# Altium PCB PCB1.PcbDoc
Units mm, origin at the board's own origin, x right, y up, seen from the top; angles counter-clockwise.
Board outline 64 x 64 mm, 2 copper layers (Top Layer, Bottom Layer), stack 0.801 mm thick; 4 components, 6 nets, 18 pads, 38 vias.
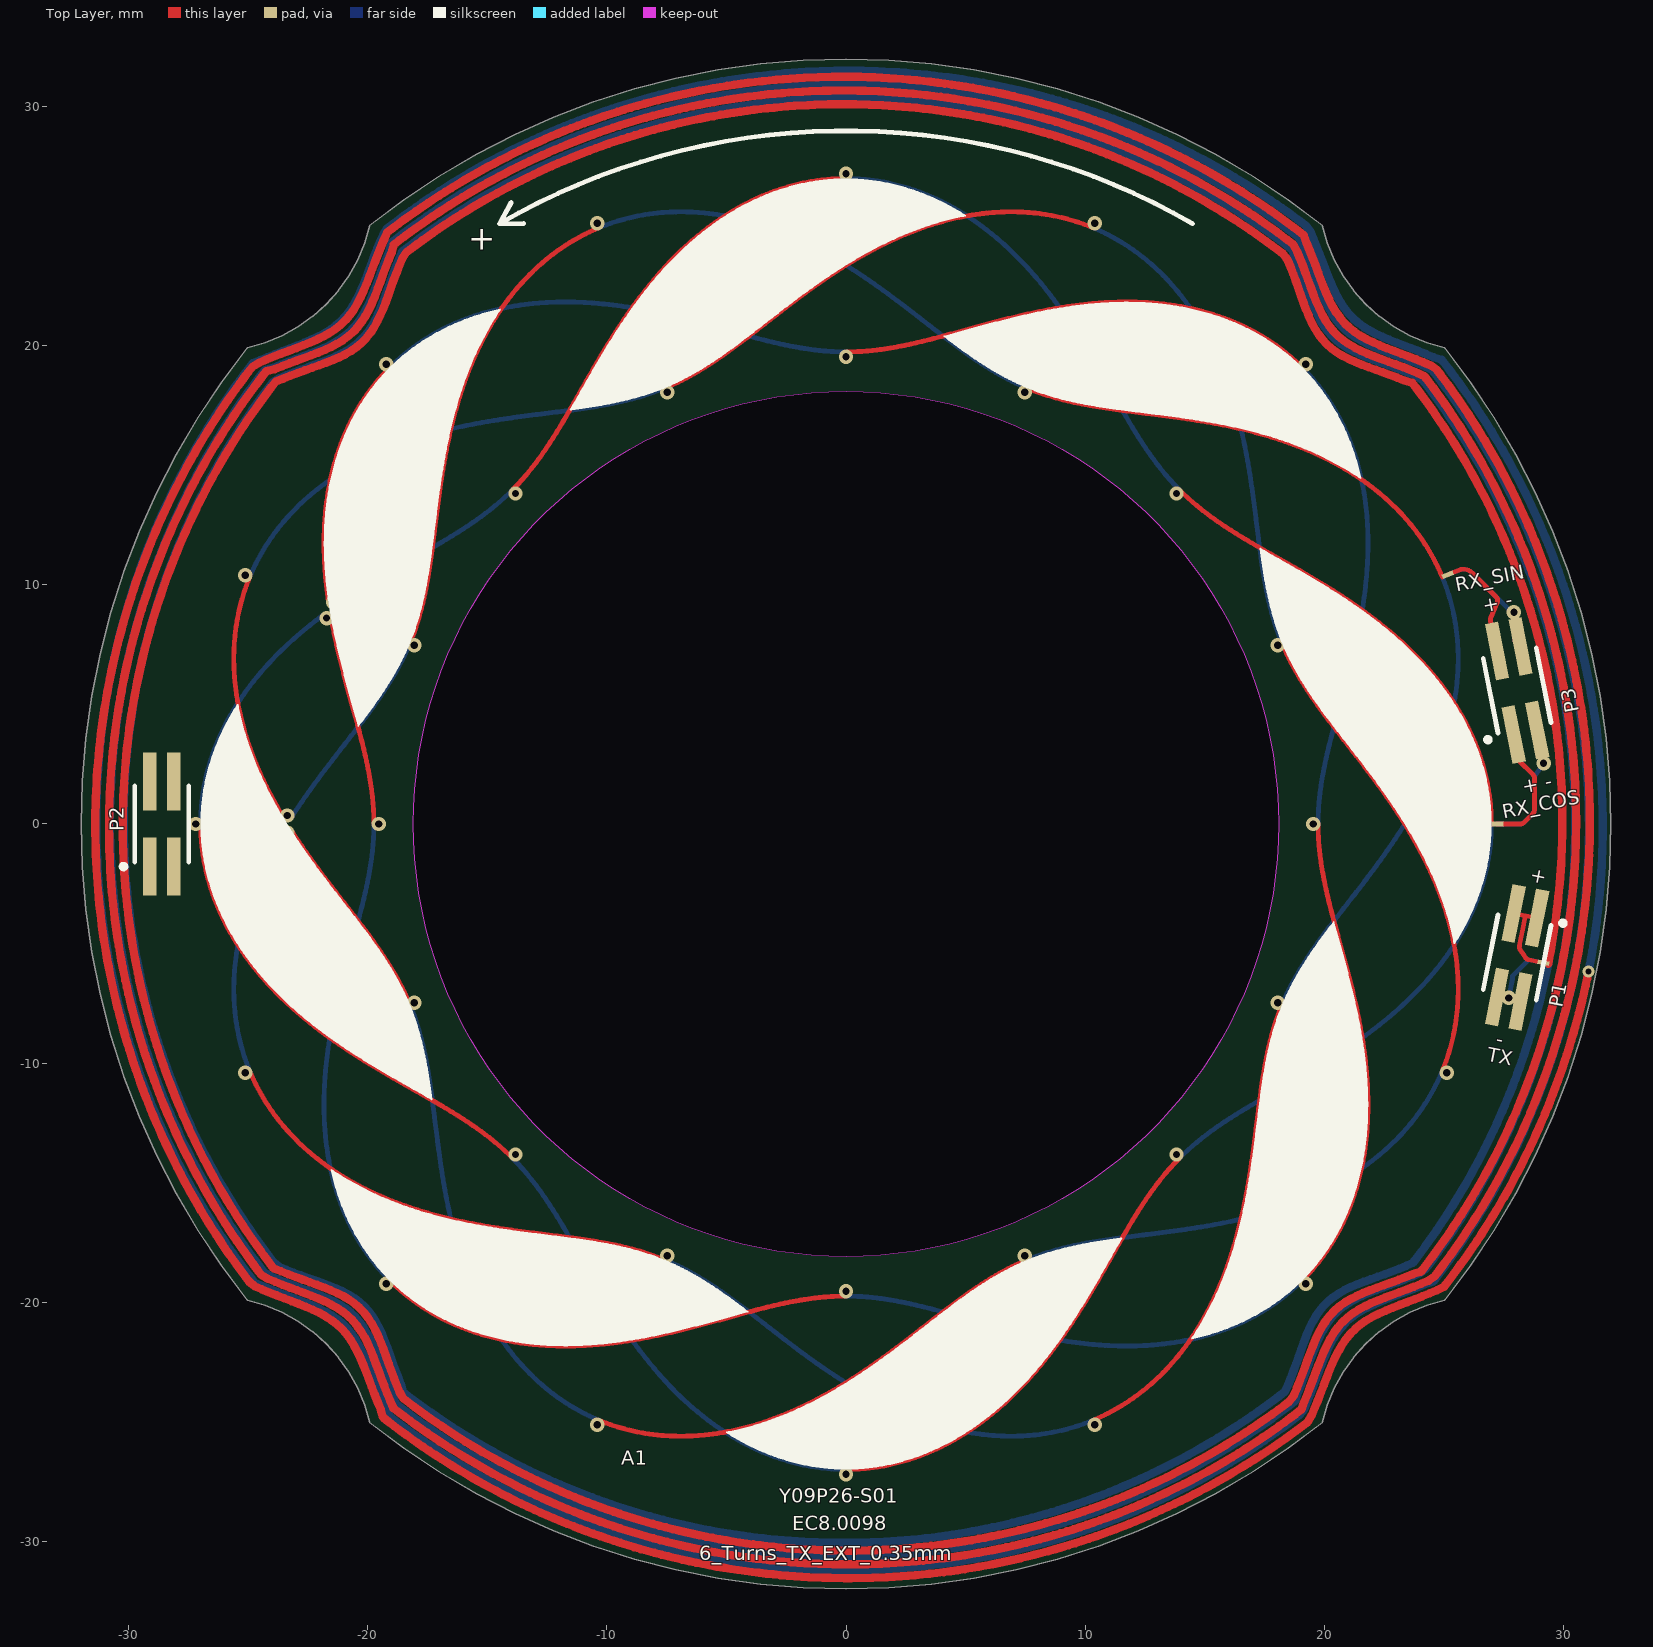
[diagram p0: Top Layer view]
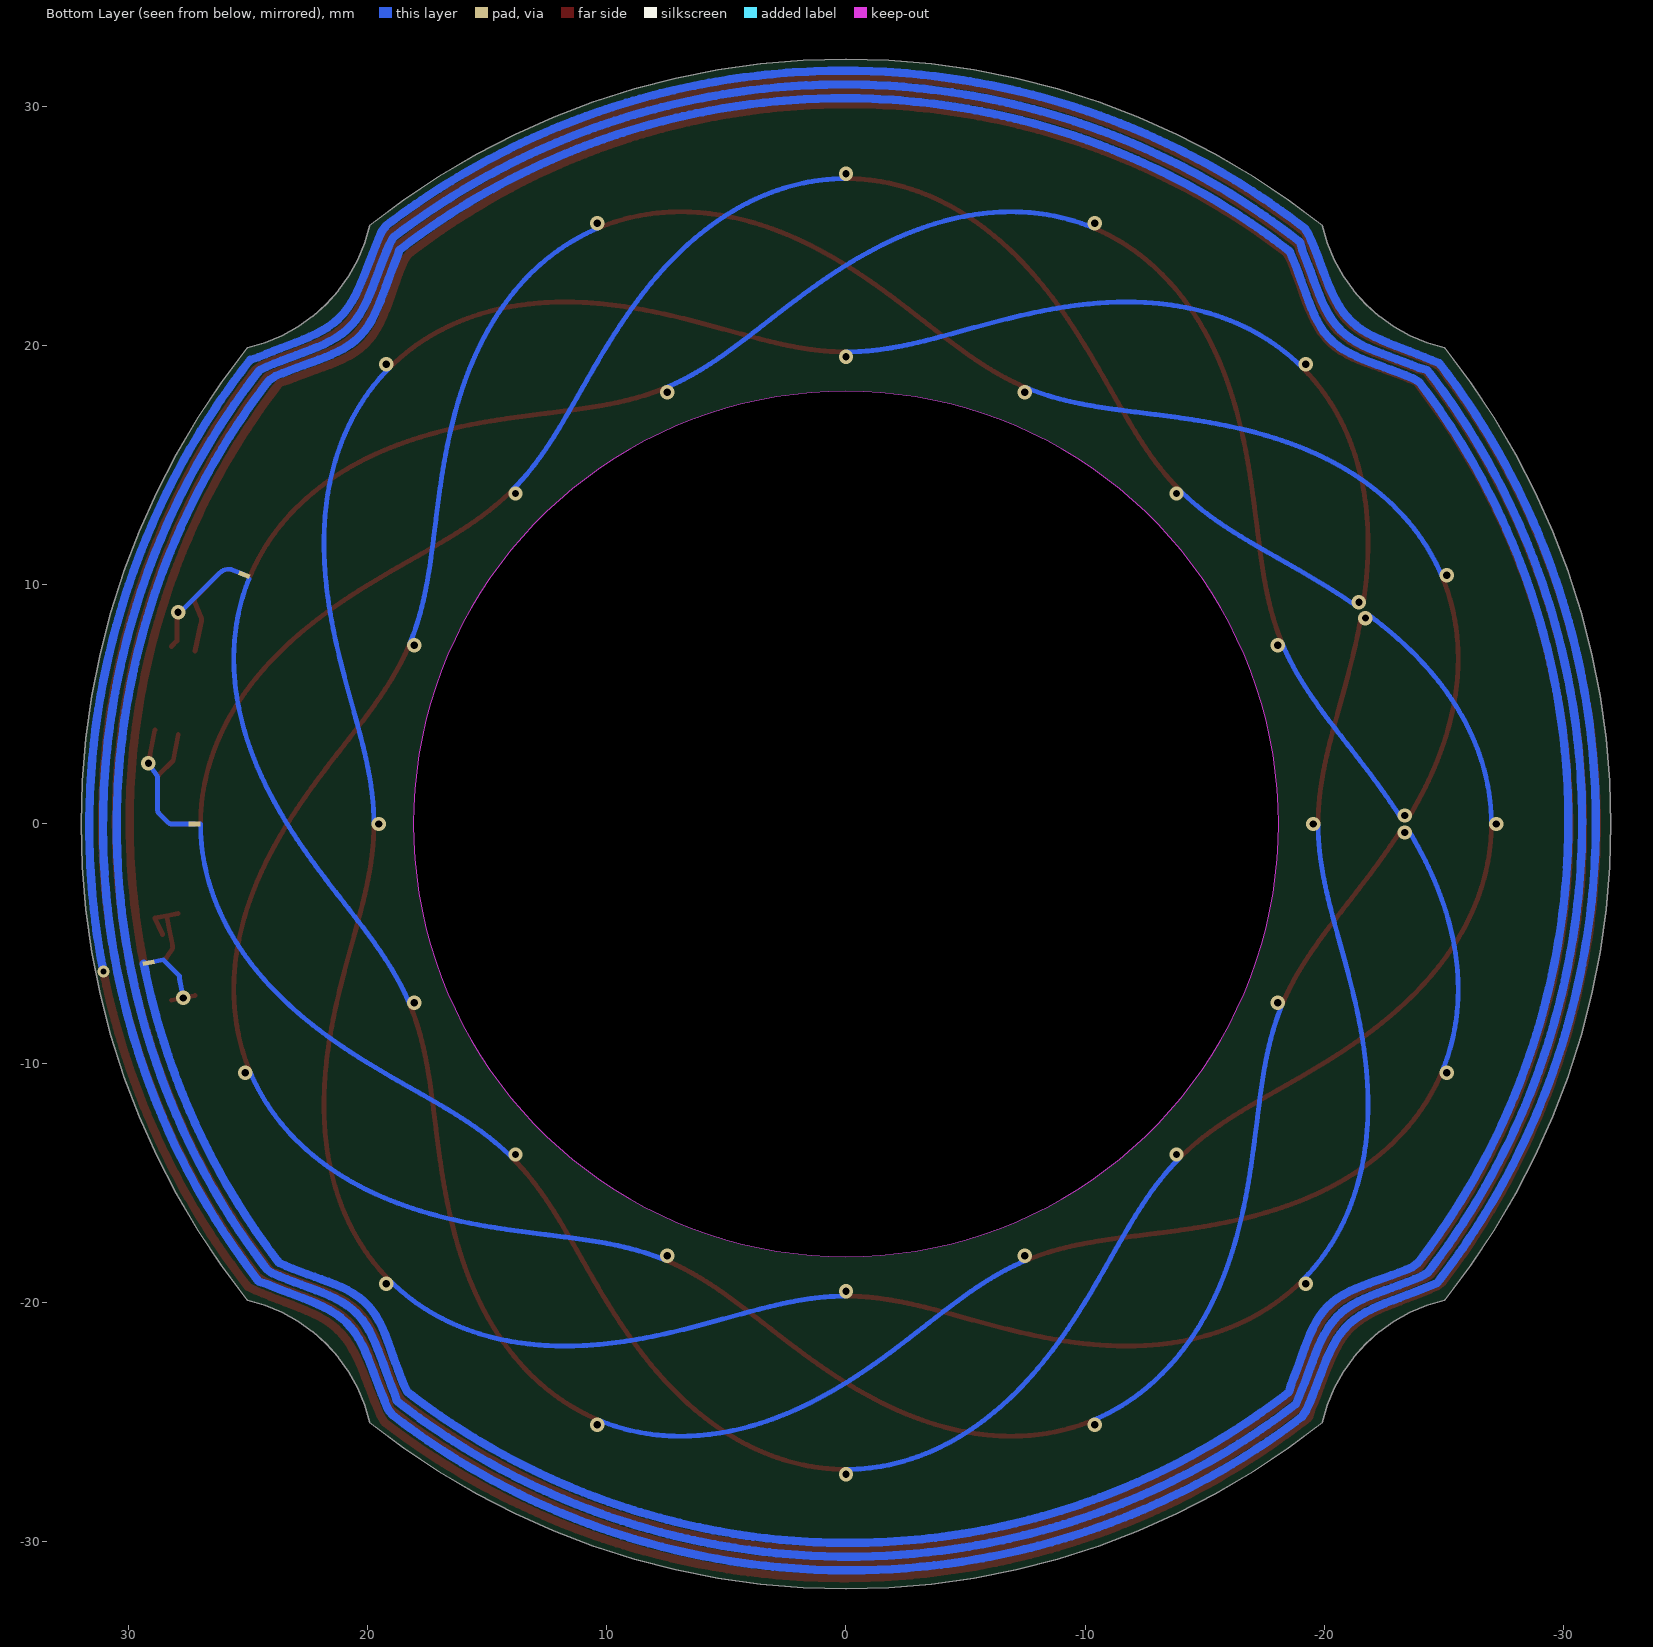
[diagram p1: Bottom Layer view, seen from below]
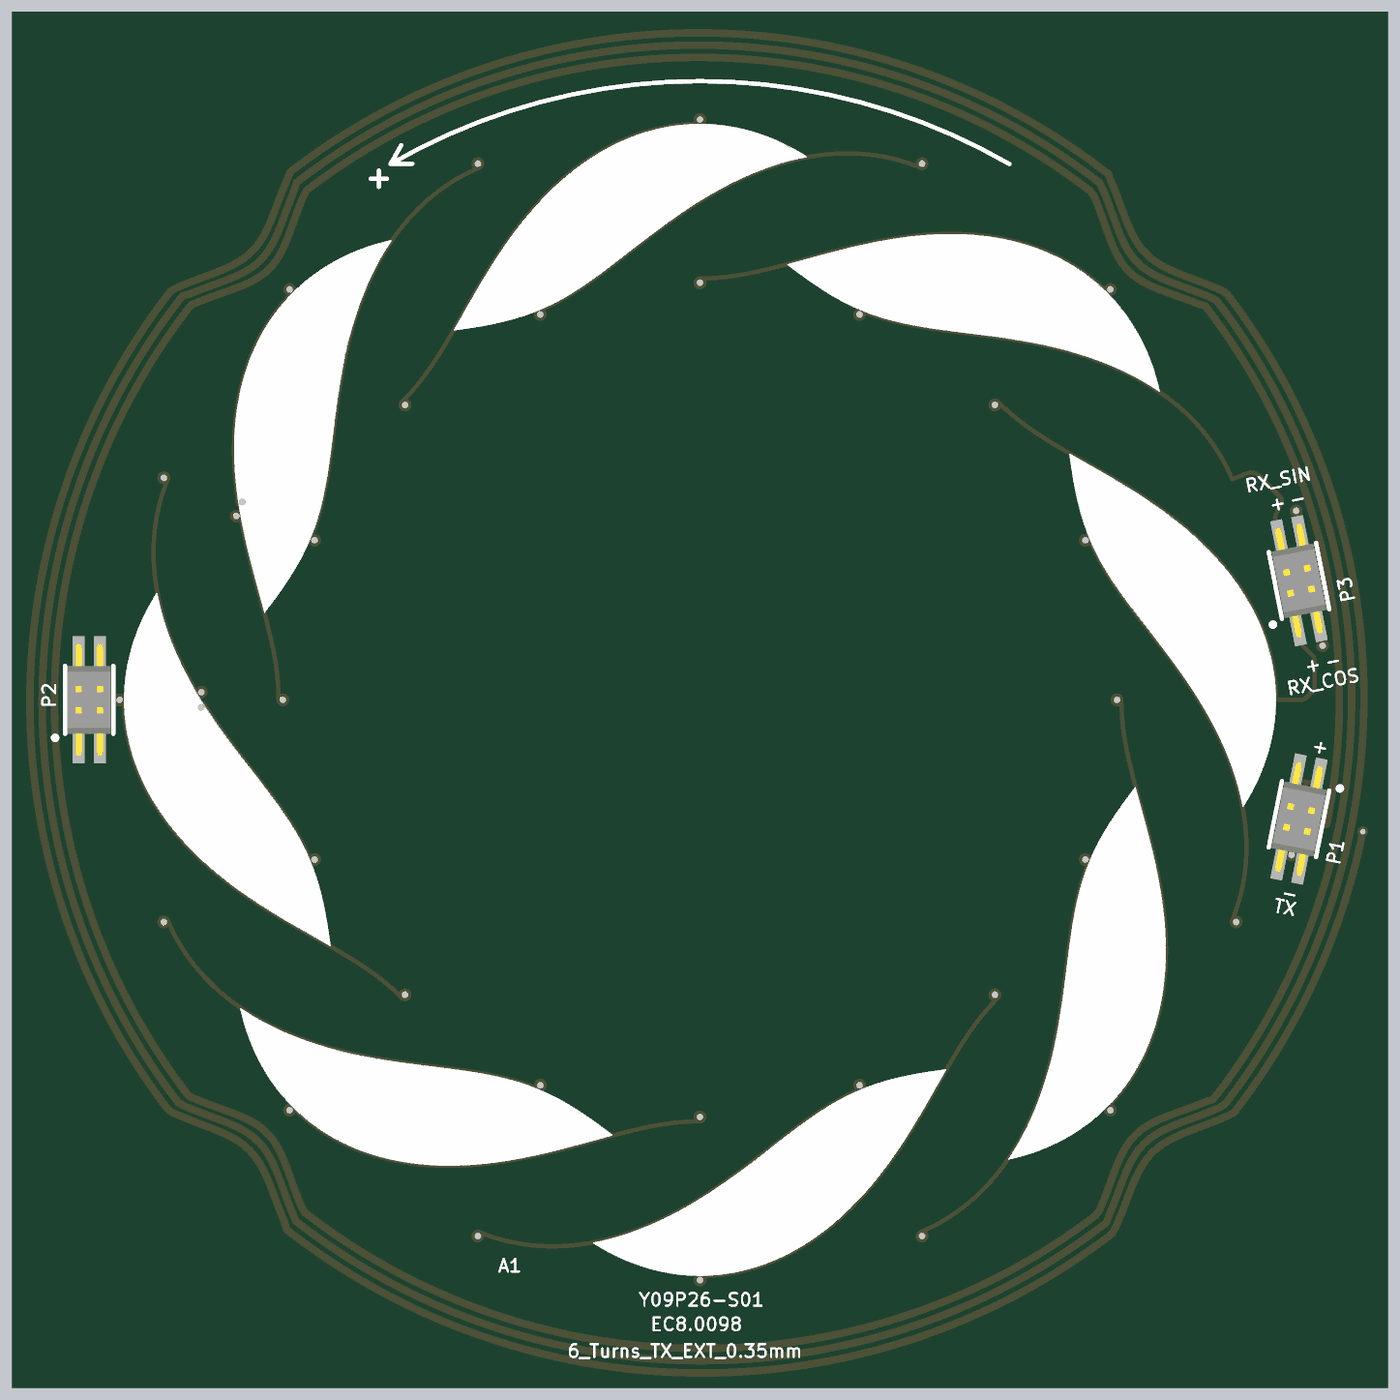
[diagram p2: 3D render of the assembled board from above, using the file's embedded part models]

## Layer stack, top to bottom
Top Solder: solder mask 0.0102, Solder Resist, Dk 3.5
Top Layer: signal copper 0.0356
Dielectric 1: dielectric 0.73, FR-4, Dk 4.8
Bottom Layer: signal copper 0.0356
Bottom Solder: solder mask 0.0102, Solder Resist, Dk 3.5

## Board outline
21.744,21.744 21.237,22.311 20.797,22.932 20.429,23.599 20.14,24.303 19.931,25.035 18.498,26.112 17.006,27.107 15.462,28.017 13.868,28.839 12.232,29.57 10.556,30.209 8.848,30.752 7.112,31.2 5.354,31.549 3.578,31.799 1.792,31.95 0,32 -1.792,31.95 -3.579,31.799 -5.354,31.549 -7.112,31.2 -8.848,30.752 -10.557,30.209 -12.232,29.57 -13.868,28.839 -15.462,28.017 -17.006,27.107 -18.498,26.112 -19.931,25.035 -20.14,24.303 -20.43,23.599 -20.797,22.932 -21.237,22.311 -21.744,21.744 -22.311,21.237 -22.932,20.797 -23.599,20.429 -24.303,20.14 -25.035,19.931 -26.112,18.498 -27.107,17.006 -28.017,15.462 -28.839,13.868 -29.57,12.232 -30.209,10.556 -30.752,8.848 -31.2,7.112 -31.549,5.354 -31.799,3.578 -31.95,1.792 -32,0 -31.95,-1.792 -31.799,-3.579 -31.549,-5.354 -31.2,-7.112 -30.752,-8.848 -30.209,-10.557 -29.57,-12.232 -28.839,-13.868 -28.017,-15.462 -27.107,-17.006 -26.112,-18.498 -25.035,-19.931 -24.303,-20.14 -23.599,-20.43 -22.932,-20.797 -22.311,-21.237 -21.744,-21.744 -21.237,-22.311 -20.797,-22.932 -20.43,-23.599 -20.14,-24.303 -19.931,-25.035 -18.498,-26.112 -17.006,-27.107 -15.462,-28.017 -13.868,-28.839 -12.232,-29.57 -10.557,-30.209 -8.848,-30.752 -7.112,-31.2 -5.354,-31.549 -3.579,-31.799 -1.792,-31.95 0,-32 1.792,-31.95 3.578,-31.799 5.354,-31.549 7.112,-31.2 8.848,-30.752 10.556,-30.209 12.232,-29.57 13.868,-28.839 15.462,-28.017 17.006,-27.107 18.498,-26.112 19.931,-25.035 20.14,-24.303 20.429,-23.599 20.797,-22.932 21.237,-22.311 21.744,-21.744 22.311,-21.237 22.932,-20.797 23.599,-20.43 24.303,-20.14 25.035,-19.931 26.112,-18.498 27.107,-17.006 28.017,-15.462 28.839,-13.868 29.57,-12.232 30.209,-10.557 30.752,-8.848 31.2,-7.112 31.549,-5.354 31.799,-3.579 31.95,-1.792 32,0 31.95,1.792 31.799,3.578 31.549,5.354 31.2,7.112 30.752,8.848 30.209,10.556 29.57,12.232 28.839,13.868 28.017,15.462 27.107,17.006 26.112,18.498 25.035,19.931 24.303,20.14 23.599,20.429 22.932,20.797 22.311,21.237
cut-out: 0,-18.1 cw(c0,0) -18.1,0 cw(c0,0) 0,18.1 cw(c0,0) 18.1,0 cw(c0,0)

## Design rules (kind name [scope] priority, off if disabled: settings)
Clearance [All] p1: gap=0.254 ignorepadtopadclearanceinfootprint=FALSE
ComponentClearance [All] p1 off: gap=0.254 collisioncheckmode=3 verticalgap=0.254 showdistances=FALSE
DiffPairsRouting [All] p1: maxlimit=0.5 minlimit=0.2 mostfreqgap=0.3 toplayer_minwidth=0.2 toplayer_maxwidth=0.5 toplayer_prefwidth=0.3 bottomlayer_minwidth=0.2 bottomlayer_maxwidth=0.5 bottomlayer_prefwidth=0.3 maxuncoupledlength=12.7
PolygonConnect [All] p1: connectstyle=Relief reliefconductorwidth=0.254 reliefentries=4 polygonreliefangle="90 Angle" airgapwidth=0.254
RoutingVias [All] p1: holewidth=0.3 width=0.6 viastyle="Through Hole" minholewidth=0.2 minwidth=0.5 maxholewidth=1 maxwidth=2
SilkToSolderMaskClearance [IsPad] p1: minsilkscreentomaskgap=0.2 clearancetoexposedcopper=TRUE
SolderMaskExpansion [All] p1: expansion=0 istentingtop=FALSE
Width [All] p1: maxlimit=0.5 minlimit=0.2 preferedwidth=0.3
27 further rules are at their usual default settings.

## Components (designator, comment, footprint, x,y, rotation, side; value= is the part's Value field where it differs from the comment)
A1 "IPS_4PP_2PH_1T_2L" IPS_4PP_2PH_1T_2L_6TX035_EXT 0,0 r0 top locked
P1 "MW-02-03-G-D-095-188" SAMTEC_MW-02-03-X-D-XXX-XXX 28.075,-5.584 r168.75 top locked
P2 "MW-02-03-G-D-095-188" SAMTEC_MW-02-03-X-D-XXX-XXX -28.625,0 r0 top locked
P3 "MW-02-03-G-D-095-188" SAMTEC_MW-02-03-X-D-XXX-XXX 28.075,5.584 r11.25 top locked

## Footprints (in the part's own frame and the unit in brackets; to place one, negate y for a bottom-side part, rotate by r counter-clockwise, add the part's x,y. Pads: shape width x height; smd on the part's side, far side on the other; paste and mask are expansions set on the pad)
IPS_4PP_2PH_1T_2L_6TX035_EXT [mm] "Inductive position sensor, 2 phase, 1 turn, 2Layers 4 Pole pairs, TX trace width 0.35mm"
  rect 0.2x0.5 smd rot 78.75 paste-2539.97 mask+0: 1(29.178,-5.804)
  rect 0.2x0.5 smd far side rot 78.75 paste-2539.97 mask+0: 2(29.178,-5.804)
  rect 0.5x0.2 smd paste-2539.97 mask+0: 3(27.25,0)
  rect 0.5x0.2 smd far side paste-2539.97 mask+0: 4(27.25,0)
  rect 0.2x0.5 smd rot 112.5 paste-2539.97 mask+0: 5(25.176,10.428)
  rect 0.2x0.5 smd far side rot 112.5 paste-2539.97 mask+0: 6(25.176,10.428)
  Top Layer drawing of 5968 lines, arcs and shapes, not listed
  Bottom Layer drawing of 5968 lines, arcs and shapes, not listed
SAMTEC_MW-02-03-X-D-XXX-XXX [mm]
  rect 0.56x2.41 smd: 01(-0.5,-1.78) 02(-0.5,1.78) 03(0.5,-1.78) 04(0.5,1.78)
  silkscreen extent -1.7,-1.88 1.13,1.59, body extent -1,-2.6 1,2.6, height 6.4

## Part data
A1: library part IPS_4PP_2PH_1T_2L_6TX035_EXT, "Inductive position sensor, 2 phase, 1 turn, 2Layers 4 Pole pairs", Ext Diameter=63mm, Int Diameter=39.5mm, MFG1=PMP, MPN1=IPS_4PP_2PH_1T_2L_6TX035_EXT
P1 P2 P3: "Samtech Male header 2x2,pitch 1mm", Max Op# temp °C=125, Min Op# Temp °C=-55, Package=None, Supplier Part Number=200-MW0203GD095188, Availability=Unavailable, ConnType="Board 2 Board", Datasheet URL=https://www.mouser.it/datasheet/3/85/1/mw_smt.pdf, MF=Samtec, MFG1=Samtec, Mount=SMD, MP=TSW-108-07-G-S, MPN1=MW-02-03-G-D-095-188, Orientation=Vertical, Pins=4, Pitch=1mm, Price=None, Supplier=Mouser, Supplier URL=https://www.mouser.it/ProductDetail/Samtec/MW-02-03-G-D-095-188?qs=Jm2GQyTW%2FbjwYpCcfsw5tg%3D%3D

## Via types
v1: diameter 0.6, hole 0.3, Top Layer to Bottom Layer, tented both sides, 37 vias
v2: diameter 0.5, hole 0.25, Top Layer to Bottom Layer, tented both sides, 1 vias

## Nets (pads, with @x,y where several pads share a name; then routed paths per layer and width w, separated by ;. In a path a pad name is that pad's centre, name@x,y a point inside that pad or via, vN(x,y) a via of type N, cw(c..) or ccw(c..) an arc to the next point about the centre after c; other vN are vias at no path point)
RX_COS_1: A1.3 P3.01 | length 5.3
  Top Layer w0.2: A1.3 28.217,0 ccw(c28.217,0.2) 28.337,0.04 ccw(c28.217,0.2) 28.358,0.058 28.742,0.442 ccw(c28.6,0.583) 28.76,0.463 ccw(c28.6,0.583) 28.8,0.583 28.8,1.917 ccw(c28.6,1.917) 28.742,2.058 28.143,2.657 P3.01
  other v1: 0,-27.2 0,-19.55 -19.233,-19.233 19.233,-19.233 -13.824,-13.824 13.824,-13.824 -27.2,0 -19.55,0 19.55,0 -21.73,8.614 -21.457,9.274 -13.824,13.824 13.824,13.824 -19.233,19.233 19.233,19.233 0,19.55 0,27.2
RX_COS_2: A1.4 P3.03 | length 5.3
  Top Layer w0.2: P3.03 29.123,2.851 v1(29.184,2.541)
  Bottom Layer w0.2: A1.4 27.975,0 28.217,0 ccw(c28.217,0.2) 28.337,0.04 ; 28.358,0.058 28.742,0.442 ccw(c28.6,0.583) 28.76,0.463 ccw(c28.6,0.583) 28.8,0.583 28.8,1.93 cw(c29,1.93) 28.836,2.045 v1(29.184,2.541)
RX_SIN_1: A1.5 P3.02 | length 4.9
  Top Layer w0.2: A1.5 25.314,10.486 25.638,10.62 cw(c25.832,10.15) 26.192,10.509 27.205,9.496 ; 27.205,9.496 cw(c27.063,9.355) 27.263,9.355 cw(c27.063,9.355) 27.247,9.277 26.97,8.628 ccw(c27.154,8.55) 26.958,8.508 27.001,8.312 P3.02
RX_SIN_2: A1.6 P3.04 | length 5.1
  Top Layer w0.2: v1(27.94,8.856) 27.989,8.807 27.989,7.657 P3.04
  Bottom Layer w0.2: A1.6 25.314,10.486 25.638,10.62 cw(c25.832,10.15) 26.193,10.509 27.845,8.856 v1(27.94,8.856)
  other v1: -10.409,-25.129 10.409,-25.129 -7.481,-18.062 7.481,-18.062 -25.13,-10.409 25.13,-10.409 -18.062,-7.481 18.062,-7.481 -23.372,-0.357 -23.372,0.357 -18.062,7.482 18.062,7.482 -25.13,10.409 -7.481,18.062 7.481,18.062 -10.409,25.13 10.409,25.13
TX_1: A1.1 P1.01 P1.03 | length 4.3
  Top Layer w0.2: P1.03 28.422,-3.839 ; 28.555,-5.68 cw(c28.596,-5.484) 28.429,-5.594 28.378,-5.517 ccw(c28.211,-5.627) 28.377,-5.515 28.2,-5.251 cw(c28.367,-5.141) 28.171,-5.102 28.33,-4.301 28.422,-3.839 ; 28.557,-5.68 A1.1@29.056,-5.779 ; P1.01@28.59,-4.635 P1.01 28.422,-3.839
  other v2: 31.066,-6.179
TX_2: A1.2 P1.02 P1.04 | length 3.6
  Top Layer w0.2: P1.04@27.235,-7.177 27.248,-7.18 v1(27.725,-7.275) P1.02@28.215,-7.373
  Bottom Layer w0.2: v1(27.725,-7.275) 27.884,-6.474 27.884,-6.353 28.557,-5.68 A1.2 A1.2@29.301,-5.828
pads on no net: P2.01 P2.02 P2.03 P2.04

## Silkscreen, mask and mechanical layers (free items; w line width, h text height)
Top Overlay:
  drawing of 11 lines, arcs and shapes, not listed
  text "+" at -15.8,24.033 h1
  text "RX_SIN" at 25.559,9.716 h0.6 r11.25
  text "-" at 27.637,9.073 h0.6 r11.25
  text "+" at 26.698,8.845 h0.6 r11.25
  text "-" at 29.287,1.473 h0.6 r11.25
  text "+" at 28.348,1.27 h0.6 r11.25
  text "RX_COS" at 27.518,0.216 h0.6 r11.25
  text "+" at 28.592,-2.389 h0.6 r348.75
  text "-" at 27.159,-9.266 h0.6 r348.75
  text "TX" at 26.793,-9.896 h0.6 r348.75
  text "Y09P26-S01" at -2.799,-28.4 h0.6
  text "EC8.0098" at -2.249,-29.55 h0.6
  text "6_Turns_TX_EXT_0.35mm" at -6.148,-30.8 h0.6
Board Shape:
  lines w0.5: -32,0 -31.95,-1.792 -31.799,-3.579 -31.549,-5.354 -31.2,-7.112 -30.752,-8.848 -30.209,-10.557 -29.57,-12.232 -28.839,-13.868 -28.017,-15.462 -27.107,-17.006 -26.112,-18.498 -25.035,-19.931 -24.303,-20.14 -23.599,-20.43 -22.932,-20.797 -22.311,-21.237 -21.744,-21.744 -21.237,-22.311 -20.797,-22.932 -20.43,-23.599 -20.14,-24.303 -19.931,-25.035 -18.498,-26.112 -17.006,-27.107 -15.462,-28.017 -13.868,-28.839 -12.232,-29.57 -10.557,-30.209 -8.848,-30.752 -7.112,-31.2 -5.354,-31.549 -3.579,-31.799 -1.792,-31.95 0,-32 1.792,-31.95 3.578,-31.799 5.354,-31.549 7.112,-31.2 8.848,-30.752 10.556,-30.209 12.232,-29.57 13.868,-28.839 15.462,-28.017 17.006,-27.107 18.498,-26.112 19.931,-25.035 20.14,-24.303 20.429,-23.599 20.797,-22.932 21.237,-22.311 21.744,-21.744 22.311,-21.237 22.932,-20.797 23.599,-20.43 24.303,-20.14 25.035,-19.931 26.112,-18.498 27.107,-17.006 28.017,-15.462 28.839,-13.868 29.57,-12.232 30.209,-10.557 30.752,-8.848 31.2,-7.112 31.549,-5.354 31.799,-3.579 31.95,-1.792 32,0 31.95,1.792 31.799,3.578 31.549,5.354 31.2,7.112 30.752,8.848 30.209,10.556 29.57,12.232 28.839,13.868 28.017,15.462 27.107,17.006 26.112,18.498 25.035,19.931 24.303,20.14 23.599,20.429 22.932,20.797 22.311,21.237 21.744,21.744 21.237,22.311 20.797,22.932 20.429,23.599 20.14,24.303 19.931,25.035 18.498,26.112 17.006,27.107 15.462,28.017 13.868,28.839 12.232,29.57 10.556,30.209 8.848,30.752 7.112,31.2 5.354,31.549 3.578,31.799 1.792,31.95 0,32 -1.792,31.95 -3.579,31.799 -5.354,31.549 -7.112,31.2 -8.848,30.752 -10.557,30.209 -12.232,29.57 -13.868,28.839 -15.462,28.017 -17.006,27.107 -18.498,26.112 -19.931,25.035 -20.14,24.303 -20.43,23.599 -20.797,22.932 -21.237,22.311 -21.744,21.744 -22.311,21.237 -22.932,20.797 -23.599,20.429 -24.303,20.14 -25.035,19.931 -26.112,18.498 -27.107,17.006 -28.017,15.462 -28.839,13.868 -29.57,12.232 -30.209,10.556 -30.752,8.848 -31.2,7.112 -31.549,5.354 -31.799,3.578 -31.95,1.792 -32,0 ; -18.1,0 cw(c0,0) 0,18.1 cw(c0,0) 18.1,0 cw(c0,0) 0,-18.1 cw(c0,0) -18.1,0
Drill Drawing:
  circle w0.254: c-37.094,54.772 r0.847
  lines w0.254: -37.94,50.115 -36.247,50.115 -36.247,51.808 -37.94,51.808 -37.94,50.115
  lines w0.381: -39.459,48.972 288.566,48.972 ; -39.459,56.592 288.566,56.592 ; -25.467,45.162 -25.467,60.402 ; -11.754,45.162 -11.754,60.402 ; 15.416,45.162 15.416,60.402 ; 28.265,45.162 28.265,60.402 ; 46.904,45.162 46.904,60.402 ; 84.992,45.162 84.992,60.402 ; 99.974,45.162 99.974,60.402 ; 118.918,45.162 118.918,60.402 ; 141.517,45.162 141.517,60.402 ; 163.203,45.162 163.203,60.402 ; 197.076,45.162 197.076,60.402 ; 230.95,45.162 230.95,60.402 ; 252.94,45.162 252.94,60.402 ; -39.459,45.162 288.566,45.162 288.566,60.402 -39.459,60.402 -39.459,45.162
  text "Symbol" at -37.173,57.735 h1.83
  text "Count" at -24.324,57.735 h1.83
  text "Hole Size" at -10.611,57.735 h1.83
  text "Plated" at 16.559,57.735 h1.83
  text "Hole Type" at 29.408,57.735 h1.83
  text "Drill Layer Pair" at 48.047,57.735 h1.83
  text "Via/Pad" at 86.135,57.735 h1.83
  text "Pad Shape" at 101.117,57.735 h1.83
  text "Template" at 120.061,57.735 h1.83
  text "Description" at 142.66,57.735 h1.83
  text "Hole Tolerance (+)" at 164.346,57.735 h1.83
  text "Hole Tolerance (-)" at 198.219,57.735 h1.83
  text "Hole Length" at 232.093,57.735 h1.83
  text "Routed Path Length" at 254.083,57.735 h1.83
  text "1" at -24.324,53.925 h1.52
  text "0.250mm (9.84mil)" at -10.611,53.925 h1.52
  text "PTH" at 16.559,53.925 h1.52
  text "Round" at 29.408,53.925 h1.52
  text "Top Layer - Bottom Layer" at 48.047,53.925 h1.52
  text "Via" at 86.135,53.925 h1.52
  text "Rounded" at 101.117,53.925 h1.52
  text "v50h25m0mx0" at 120.061,53.925 h1.52
  text "-" at 232.093,53.925 h1.52
  text "-" at 254.083,53.925 h1.52
  text "37" at -24.324,50.115 h1.52
  text "0.300mm (11.81mil)" at -10.611,50.115 h1.52
  text "PTH" at 16.559,50.115 h1.52
  text "Round" at 29.408,50.115 h1.52
  text "Top Layer - Bottom Layer" at 48.047,50.115 h1.52
  text "Via" at 86.135,50.115 h1.52
  text "Rounded" at 101.117,50.115 h1.52
  text "v60h30m0mx0(1)" at 120.061,50.115 h1.52
  text "-" at 232.093,50.115 h1.52
  text "-" at 254.083,50.115 h1.52
  text "38 Total" at -24.324,46.305 h1.52

## Dimensions
-32,0 to 32,0 on Dimensions
-18.1,0 to 18.1,0 on Dimensions